# Altium PCB PCB1.PcbDoc
Units mil, origin at the board's own origin, x right, y up, seen from the top; angles counter-clockwise.
Board outline 4832.68 x 2214.57 mil, 2 copper layers (Top Layer, Bottom Layer); 45 components, 47 nets, 237 pads, 146 vias.
Unrouted connection lines stored in the file: 2.
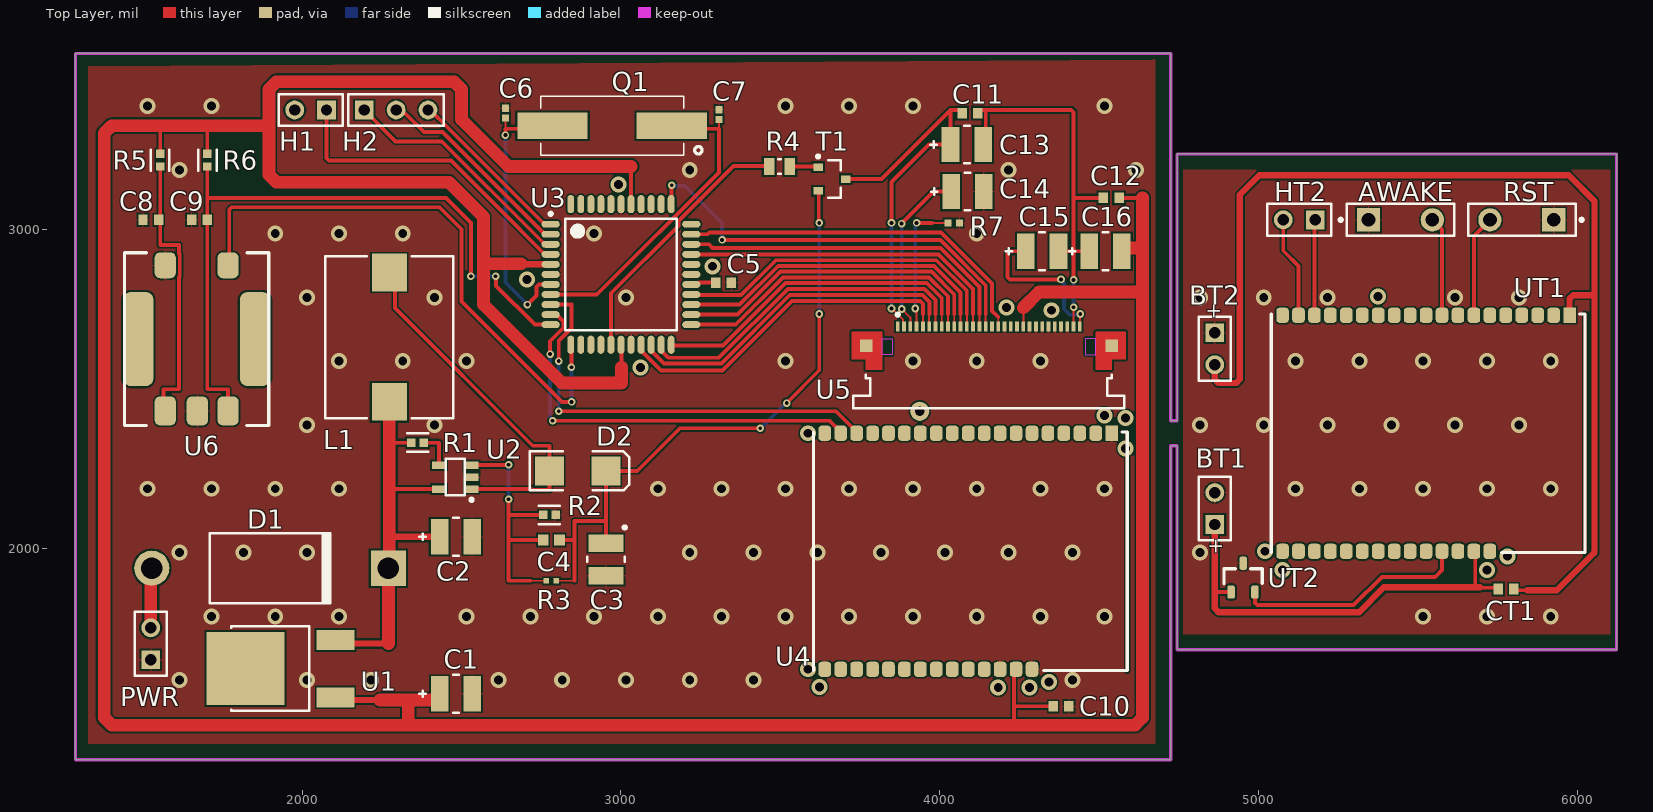
[diagram p0: Top Layer view]
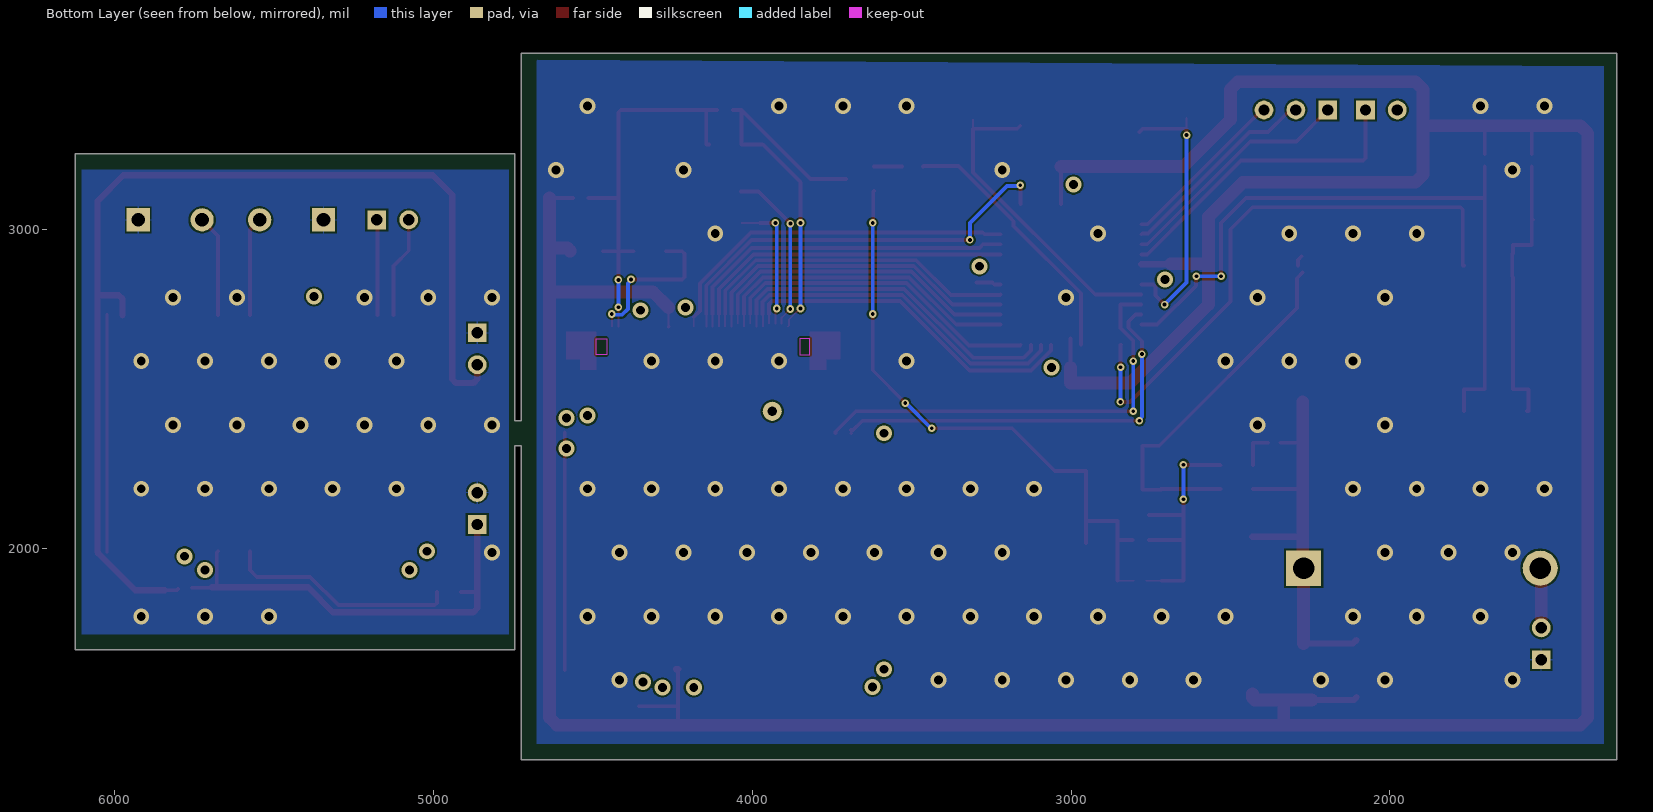
[diagram p1: Bottom Layer view, seen from below]

## Layer stack, top to bottom
Top Solder: solder mask 0.4, Solder Resist, Dk 3.5
Top Layer: signal copper 1.4
Dielectric 1: dielectric 12.6, FR-4, Dk 4.8
Bottom Layer: signal copper 1.4
Bottom Solder: solder mask 0.4, Solder Resist, Dk 3.5

## Board outline
1289.37,1338.58 1289.37,3553.15 4724.41,3553.15 4724.41,2401.57 4744.09,2401.57 4744.09,3238.19 5127.95,3238.19 5679.13,3238.19 6122.05,3238.19 6122.05,1683.07 4744.09,1683.07 4744.09,2322.83 4724.41,2322.83 4724.41,1338.58

## Design rules (kind name [scope] priority, off if disabled: settings)
BoardOutlineClearance [All] p1: gap=7.87 ignorepadtopadclearanceinfootprint=FALSE
Clearance [All] p1: gap=6 ignorepadtopadclearanceinfootprint=TRUE except(9.84: Arc-Hole Track-Hole SMDPad-Hole THPad-Hole Via-Hole Fill-Hole Poly-Hole Region-Hole Text-Hole)
ComponentClearance [All] p1: gap=5 collisioncheckmode=3 verticalgap=5 showdistances=TRUE
DiffPairsRouting [All] p1: maxlimit=10 minlimit=5 mostfreqgap=5 toplayer_minwidth=5 toplayer_maxwidth=1000 toplayer_prefwidth=5 bottomlayer_minwidth=5 bottomlayer_maxwidth=1000 bottomlayer_prefwidth=5 maxuncoupledlength=500
Height [All] p1: minheight=0 maxheight=71497.94 prefheight=500
HoleSize [All] p1: absolutevalues=TRUE maxlimit=248.03 minlimit=11.81 maxpercent=80.000 minpercent=20.000
HoleToHoleClearance [All] p1: gap=9.84 allowstackedmicrovias=FALSE
MinimumAnnularRing [All] p1: minimumring=3
MinimumSolderMaskSliver [All] p1: minsoldermaskwidth=0
PlaneClearance [All] p1: clearance=5
PlaneConnect PlaneConnectPowerPads [InPadClass('PowerPads')] p1: planeconnectstyle=Direct reliefexpansion=20 reliefentries=4 reliefconductorwidth=10 reliefairgap=10
PlaneConnect [All] p2: pad.planeconnectstyle=Relief pad.reliefexpansion=11.81 pad.reliefentries=4 pad.reliefconductorwidth=5 pad.reliefairgap=5 via.planeconnectstyle=Direct via.reliefexpansion=11.81 via.reliefentries=4 via.reliefconductorwidth=5 via.reliefairgap=5
PolygonConnect PolygonConnectPowerPads [All vs (InPadClass('PowerPads'))] p1: connectstyle=Direct reliefconductorwidth=10 reliefentries=4 polygonreliefangle="90 Angle" airgapwidth=10
PolygonConnect [All] p2: thpad.connectstyle=Relief thpad.reliefconductorwidth=5 thpad.reliefentries=4 thpad.polygonreliefangle="90 Angle" thpad.airgapwidth=5 smdpad.connectstyle=Relief smdpad.reliefconductorwidth=5 smdpad.reliefentries=4 smdpad.polygonreliefangle="90 Angle" smdpad.airgapwidth=5 via.connectstyle=Direct via.reliefconductorwidth=5 via.reliefentries=4 via.polygonreliefangle="90 Angle" via.airgapwidth=5
RoutingCorners [All] p1: cornerstyle=90-Degree minsetback=100 maxsetback=100
RoutingVias [All] p1: holewidth=11.81 width=23.62 viastyle="Through Hole" minholewidth=11.81 minwidth=23.62 maxholewidth=23.62 maxwidth=259.84
SilkToSilkClearance [All] p1: silktosilkclearance=0
SilkToSolderMaskClearance [IsPad] p1: minsilkscreentomaskgap=5 clearancetoexposedcopper=TRUE
SolderMaskExpansion [All] p1: expansion=2.95 istentingtop=FALSE
Width "Schematic Width Constraint" [InNet('NetC11_2')] p1: maxlimit=50 minlimit=6 preferedwidth=12 minimp=50.000000 maximp=50.000000 favimp=50.000000
Width [All] p2: maxlimit=50 minlimit=6 preferedwidth=12 minimp=50.000000 maximp=50.000000 favimp=50.000000
19 further rules are at their usual default settings.

## Classes and differential pairs
component class SCH_Wojcik: AWAKE BT1 BT2 C2 C3 C4 C5 C6 C7 C8 C9 C10 C11 C12 C13 C14 C15 C16 CT1 D1 D2 H1 H2 HT2 L1 PWR Q1 R1 R2 R3 R4 R5 R6 R7 RST T1 U1 U2 U7 UT1 UT2

## Components (designator, comment, footprint, x,y, rotation, side; value= is the part's Value field where it differs from the comment)
AWAKE "" SPST-2 5444.49,3031.5 r0 top
BT1 "Battery" BAT-2 4862.2,2125.98 r90 top
BT2 "Battery" BAT-2 4862.2,2627.17 r270 top
C1 "4.7uF" FP-TAJB-MFG 2482.28,1545.28 r180 top
C2 "1uF" FP-TAJB-MFG 2482.28,2037.4 r180 top
C3 "10uF" CAPMP3529X21-T_V 2952.76,1966.54 r270 top
C4 "150pF" CAPC1608X90X35LL15T15 2781.5,2027.56 r0 top
C5 "100nF" CAPC1608X90X35LL10T15 3321.85,2834.65 r180 top
C6 "22pF" CAPC1005X56X25LL10T15 2637.8,3366.14 r270 top
C7 "22pF" CAPC1005X56X25LL10T15 3307.09,3361.81 r270 top
C8 "100nF" CAPC1608X90X35LL10T15 1525.59,3031.5 r0 top
C9 "100nF" CAPC1608X90X35LL10T15 1678.15,3031.5 r0 top
C10 "100nF" CAPC1608X90X35LL10T15 4379.92,1505.91 r180 top
C11 "100nF" CAPC1608X90X35LL10T15 4094.49,3366.14 r180 top
C12 "100nF" CAPC1608X90X35LL10T15 4537.4,3100.39 r180 top
C13 "4.7uF" FP-TAJB-MFG 4084.65,3267.72 r180 top
C14 "4.7uF" FP-TAJB-MFG 4086.61,3120.08 r180 top
C15 "4.7uF" FP-TAJB-MFG 4320.87,2933.07 r180 top
C16 "4.7uF" FP-TAJB-MFG 4519.69,2933.07 r180 top
CT1 "100nF" CAPC1608X90X35LL10T15 5775.59,1874.02 r180 top
D1 "Diode 1N5407" DO-201AD 1899.61,1938.98 r0 top
D2 "D Schottky" SMB 2864.17,2244.09 r0 top
H1 "Header 2" HDR1X2 2076.77,3375.98 r180 top
H2 "Header 3" HDR1X3 2194.88,3375.98 r0 top
HT2 "Header 2" HDR1X2 5177.17,3031.5 r180 top
L1 "33uH" WE-PD4-L 2273.62,2663.39 r90 top
PWR "Header 2" HDR1X2 1525.59,1651.97 r90 top
Q1 "11.059MHZ" XTAL_ABLS2-11.059MHZ-B4Y-T 2972.44,3326.77 r180 top
R1 "10k" FP-CRCW0402-e3-IPC_A 2362.12,2332.68 r180 top
R2 "10k" FP-CRCW0402-e3-IPC_A 2775.51,2106.3 r180 top
R3 "110k" RESC1005X40X25LL05T05 2781.5,1899.61 r0 top
R4 "1k" RESC2013X50X30LL20T20 3497.05,3198.82 r180 top
R5 "10k" FP-CRCW0402-e3-IPC_A 1555.12,3218.5 r90 top
R6 "10k" FP-CRCW0402-e3-IPC_A 1702.76,3218.59 r90 top
R7 "820k" RESC1005X40X25NL05T05 4043.31,3021.65 r180 top
RST "" SPST-2 5825.2,3031.5 r180 top
T1 "BC858C" INF-SOT23_L 3661.42,3159.45 r0 top
U1 "LP2950CDT-3.0" ON_Semi_369C_0 1899.61,1624.02 r270 top
U2 "LM2735X" SOT95P280X145-5N 2480.32,2224.41 r180 top
U3 "Atmega16" 44A_L 3000,2860.24 r0 top
U4 "ETRX357" ETRX357 4095.67,1992.13 r180 top
U5 "OLED 128X64" MOLX-52435-3071 4153.54,2666.85 r0 top
U6 "E20" Encoder 1669.29,2657.48 r0 top
UT1 "ETRX357" ETRX357 5531.5,2362.2 r180 top
UT2 "TC1047" SOT-23 4950.79,1909.45 r0 top

## Footprints (in the part's own frame and the unit in brackets; to place one, negate y for a bottom-side part, rotate by r counter-clockwise, add the part's x,y. Pads: shape width x height; smd on the part's side, far side on the other; paste and mask are expansions set on the pad)
44A_L [mm] "Thin QFP, 44-Leads, Body 10x10mm, Pitch 0.8mm, IPC High Density"
  oval 1.45x0.55 smd: 1(-5.6,4) 2(-5.6,3.2) 3(-5.6,2.4) 4(-5.6,1.6) 5(-5.6,0.8) 6(-5.6,0) 7(-5.6,-0.8) 8(-5.6,-1.6) 9(-5.6,-2.4) 10(-5.6,-3.2) 11(-5.6,-4) 23(5.6,-4) 24(5.6,-3.2) 25(5.6,-2.4) 26(5.6,-1.6) 27(5.6,-0.8) 28(5.6,0) 29(5.6,0.8) 30(5.6,1.6) 31(5.6,2.4) 32(5.6,3.2) 33(5.6,4)
  oval 0.55x1.45 smd: 12(-4,-5.6) 13(-3.2,-5.6) 14(-2.4,-5.6) 15(-1.6,-5.6) 16(-0.8,-5.6) 17(0,-5.6) 18(0.8,-5.6) 19(1.6,-5.6) 20(2.4,-5.6) 21(3.2,-5.6) 22(4,-5.6) 34(4,5.6) 35(3.2,5.6) 36(2.4,5.6) 37(1.6,5.6) 38(0.8,5.6) 39(0,5.6) 40(-0.8,5.6) 41(-1.6,5.6) 42(-2.4,5.6) 43(-3.2,5.6) 44(-4,5.6)
  silkscreen extent -5.72,-4.45 4.45,4.95, body extent -5,-5 5,5, height 1.2
BAT-2 [mm] "Battery; 2 Leads"
  rect 1.5x1.5 hole 0.9: 1(-1.27,0)
  round 1.5 hole 0.9: 2(1.27,0)
  silkscreen extent -2.54,-1.27 2.54,1.27
CAPC1005X56X25LL10T15 [mm] "Chip Capacitor, 2-Leads, Body 1.00x0.50mm, IPC High Density"
  rect 0.58x0.54 smd: 1(-0.39,0) 2(0.39,0)
  body extent -0.55,-0.3 0.55,0.3, height 0.56
CAPC1608X90X35LL10T15 [mm]
  rect 0.75x0.85 smd: 1(-0.625,0) 2(0.625,0)
  body extent -0.85,-0.45 0.85,0.45, height 0.9
CAPC1608X90X35LL15T15 [mm] "Chip Capacitor, 2-Leads, Body 1.60x0.81mm, IPC High Density"
  rect 0.85x0.9 smd: 1(-0.65,0) 2(0.65,0)
  body extent -0.88,-0.48 0.87,0.48, height 0.9
CAPMP3529X21-T_V [mm] "Molded Capacitor, 2-Leads, Body 3.70x3mm"
  rect 1.4x2.8 smd: 1(-1.3,0) 2(1.3,0)
  silkscreen extent -2.67,-1.5 0.2,1.63, body extent -2.07,-1.5 2.07,1.5, height 2.1
DO-201AD [mm] "Diode, Axial; Body 9.5 x 5.6 mm (LxDia. max), Lead Dia. 1.32 mm (max)"
  round 2.8 hole 1.7: 1(-9.42,0)
  rect 2.8x2.8 hole 1.7: 2(9.42,0)
  silkscreen extent -4.8,-2.8 4.9,2.8
Encoder [mm]
  rrect50% 1.7x2.3 smd: A(-2.5,-5.725) B(2.5,-5.725) C(0.053,-5.725)
  rrect50% 1.7x2.05 smd: S1(-2.5,5.87) S2(2.5,5.87)
  rrect50% 2.4x7.5 smd: ""(-4.65,0) ""(4.65,0)
  silkscreen extent -5.75,-6.88 5.75,6.88, body extent -5.75,-6.88 5.75,6.88, height 6.5
ETRX357 [mm]
  rect 1x1.2 smd paste-0.12 mask+0.102: 1(-11.26,-9.4)
  rrect50% 1x1.2 smd paste-0.12 mask+0.102: 2(-9.99,-9.4) 3(-8.72,-9.4) 4(-7.45,-9.4) 5(-6.18,-9.4) 6(-4.91,-9.4) 7(-3.64,-9.4) 8(-2.37,-9.4) 9(-1.1,-9.4) 10(0.17,-9.4) 11(1.44,-9.4) 12(2.71,-9.4) 13(3.98,-9.4) 14(5.25,-9.4) 15(6.52,-9.4) 16(7.79,-9.4) 17(9.06,-9.4) 18(10.33,-9.4) 19(11.6,-9.4) 20(11.6,9.4) 21(10.33,9.4) 22(9.06,9.4) 23(7.79,9.4) 24(6.52,9.4) 25(5.25,9.4) 26(3.98,9.4) 27(2.71,9.4) 28(1.44,9.4) 29(0.17,9.4) 30(-1.1,9.4) 31(-2.37,9.4) 32(-3.64,9.4) 33(-4.91,9.4)
  Top Layer lines w0.254: -12.5,9.5 -12.5,-9.5
  silkscreen extent -12.5,-9.5 12.5,9.5, body extent -12.5,-9.5 12.5,9.5, height 3.8
FP-CRCW0402-e3-IPC_A [mil]
  rect 26.31x26.48 smd paste+0 mask+0: 1(-19.77,0) 2(19.77,0)
  silkscreen extent -33,-29 33,29
FP-TAJB-MFG [mm]
  rect 1.4x2.8 smd paste+0 mask+0: 1(-1.3,0) 2(1.3,0)
  silkscreen extent -0.23,-1.5 2.9,1.5, body extent -2.1,-1.6 2.1,1.6, height 0.25
HDR1X2 [mm] "Connector; Header; 2 Position"
  rect 1.5x1.5 hole 0.9: 1(0,0)
  round 1.5 hole 0.9: 2(2.54,0)
  silkscreen extent -1.27,-1.27 3.81,1.27
HDR1X3 [mm] "Connector; Header; 3 Position"
  rect 1.5x1.5 hole 0.9: 1(0,0)
  round 1.5 hole 0.9: 2(2.54,0) 3(5.08,0)
  silkscreen extent -1.27,-1.27 6.35,1.27
INF-SOT23_L [mm] "SOT23, 3-Leads, Body 2.9x1.3 mm, Pitch 0.95 mm, IPC High Density"
  rect 0.75x0.6 smd: 1(-1.1,0.95) 2(-1.1,-0.95) 3(1.1,0)
  silkscreen extent -1.22,-1.5 0.7,1.92, body extent -0.7,-1.5 0.7,1.5, height 1.1
MOLX-52435-3071 [mm] "FPC Connector, 30-Leads, Right Angle, Pitch 0.5 mm, Mated Height 2.0 mm, SMT"
  rect 0.3x0.8 smd: 1(-7.25,0.762) 2(-6.75,0.762) 3(-6.25,0.762) 4(-5.75,0.762) 5(-5.25,0.762) 6(-4.75,0.762) 7(-4.25,0.762) 8(-3.75,0.762) 9(-3.25,0.762) 10(-2.75,0.762) 11(-2.25,0.762) 12(-1.75,0.762) 13(-1.25,0.762) 14(-0.75,0.762) 15(-0.25,0.762) 16(0.25,0.762) 17(0.75,0.762) 18(1.25,0.762) 19(1.75,0.762) 20(2.25,0.762) 21(2.75,0.762) 22(3.25,0.762) 23(3.75,0.762) 24(4.25,0.762) 25(4.75,0.762) 26(5.25,0.762) 27(5.75,0.762) 28(6.25,0.762) 29(6.75,0.762) 30(7.25,0.762)
  rect 1x1 smd: MP1(-9.779,-0.752) MP2(9.779,-0.752)
  Top Layer region: -8.5,0.362 -10.9,0.362 -10.9,-1.838 -9.8,-1.838 -9.8,-2.688 -8.5,-2.688
  Top Layer region: 8.5,0.362 10.9,0.362 10.9,-1.838 9.8,-1.838 9.8,-2.688 8.5,-2.688
  Keep-Out Layer region: 8.5,-0.193 7.7,-0.193 7.7,-1.493 8.5,-1.493
  Keep-Out Layer region: -8.5,-0.193 -7.7,-0.193 -7.7,-1.493 -8.5,-1.493
  silkscreen extent -10.8,-5.74 10.8,1.84, body extent -10.8,-5.74 10.8,0.86, height 2.05
ON_Semi_369C_0 [mm]
  rect 1.6x3 smd paste+0 mask+0: 1(-2.285,5.215) 3(2.285,5.215)
  rect 5.8x6.2 smd paste+0 mask+0: 4(0,-1.965)
  silkscreen extent -3.36,-3.11 3.36,3.11, body extent -3.27,-5.76 3.27,4.18, height 2.42
RESC1005X40X25LL05T05 [mm] "Chip Resistor, 2-Leads, Body 1.00x0.50mm, IPC High Density"
  rect 0.45x0.45 smd: 1(-0.4,0) 2(0.4,0)
  body extent -0.53,-0.27 0.53,0.28, height 0.4
RESC1005X40X25NL05T05 [mm] "Chip Resistor, 2-Leads, Body 1.00x0.50mm, IPC Medium Density"
  rect 0.55x0.55 smd: 1(-0.45,0) 2(0.45,0)
  body extent -0.53,-0.27 0.53,0.28, height 0.4
RESC2013X50X30LL20T20 [mm] "Chip Resistor, 2-Leads, Body 2.00x1.25mm, IPC High Density"
  rect 0.85x1.35 smd: 1(-0.825,0) 2(0.825,0)
  silkscreen extent -0.1,-0.58 0.1,0.58, body extent -1.1,-0.72 1.1,0.72, height 0.5
SMB [mm] "DO-214-AA/SMB; 2 C-Bend Leads; Body 5.3 x 3.6 mm, inc. leads (LxW)"
  rect 2.3x2.3 smd: 1(-2.25,0) 2(2.25,0)
  silkscreen extent -3.8,-1.55 4.1,1.55
SOT95P280X145-5N [mm] "SOT23, 5-Leads, Body 2,90x2,80mm, Pitch 0,95mm, IPC Medium Density"
  rect 1.1x0.6 smd: 1(-1.3,0.95) 2(-1.3,0) 3(-1.3,-0.95) 4(1.3,-0.95) 5(1.3,0.95)
  silkscreen extent -1.43,-1.45 0.75,1.92, body extent -0.87,-1.52 0.87,1.53, height 1.45
SOT-23 [mm]
  rrect50% 0.6x1.05 smd paste-0.1: 1(-0.95,-1.15) 2(0.95,-1.15) 3(0,1.15)
  silkscreen extent -1.53,-0.5 1.53,0.7, body extent -1.52,-0.7 1.53,0.7, height 1.02
SPST-2 [mm] "Switch; 2 Leads"
  rect 1.85x1.85 hole 1.1: 1(-2.54,0)
  round 1.85 hole 1.1: 2(2.54,0)
  silkscreen extent -4.89,-1.27 4.28,1.27
WE-PD4-L [mm] "SMD Inductor, 2-Leads, Body 12.7 x 10.0 mm"
  rect 3x2.8 smd: 1(-5.15,0) 2(5.15,0)
  silkscreen extent -6.45,-5.1 6.45,5.1, body extent -6.35,-4.95 6.35,4.97, height 4.99
XTAL_ABLS2-11.059MHZ-B4Y-T [mm]
  rect 5.6x2.1 smd: 1(-4.75,0) 2(4.75,0)
  silkscreen extent -7.15,-2.35 5.7,2.35

## Part data
AWAKE RST: library part SW-SPST, "Single-Pole, Single-Throw Switch", LatestRevisionDate=17-Jul-2002, LatestRevisionNote="Re-released for DXP Platform.", PackageDescription="Switch; 2 Leads", PackageReference=SPST-2, Published=24-Mar-1999, Publisher="Altium Limited"
BT1 BT2: "Multicell Battery", LatestRevisionDate=17-Jul-2002, LatestRevisionNote="Re-released for DXP Platform.", PackageDescription="Battery; 2 Leads", PackageReference=BAT-2, Published=24-Mar-1999, Publisher="Altium Limited"
C1 C13 C14 C15 C16: library part cap4.7u, "CAP TANT 4.7UF 10% 10V 1411", Manufacturer="AVX Corporation", Manufacturer Part Number=TAJB475K010RNJ, Package=TAJB, Ripple Current=146mA, Temperature="-55°C to +125°C", Temperature Range High=+125°C, Temperature Range Low=-55°C, Tolerance=10%, Voltage Rating=10V, Automotive=No, Capacitance=4.7uF, Category=Cap, ComponentLink2Description=Datasheet, ComponentLink2URL=http://datasheets.avx.com/TAJ.pdf, Device Class L1="Passive Components", Device Class L2=Capacitors, Device Class L3="Tantalum Capacitors", Digikey Description="CAP TANT 4.7UF 10% 10V 1411", Dissipation Factor=6%, Esr=4Ω, Footprint Url=https://www.avx.com/docs/techinfo/TechSumAppGuide.pdf, Height=2.1mm, Lead Free=Yes, Life=1000Hours, Material=Tantalum, Mouser Description="Cap Tant Solid 4.7uF 10V B CASE 10% (3.5 X 2.8 X 1.9mm) SMD 3528-21 4 Ohm 125 C T/R", Octopart=https://octopart.com/tajb475k010rnj-avx-2636133, RoHS=TRUE
C2: "CAP TANT 1UF 10% 35V 1411", Case Code (Imperial)=1210, Case Code (Metric)=3528, Dielectric Material=Tantalum, ESR (Equivalent Series Resistance)=6.5R, Leakage Current=500nA, Max Operating Temperature=125°C, Min Operating Temperature=-55°C, Package Quantity=1, Tolerance=10%, Voltage=35V, Capacitance=1uF, Case/Package=1210, Construction=Flat, Depth=2.8mm, Dissipation Factor=4%, Features="General Purpose", Height=1.9mm, Height - Seated (Max)=0.083inch, Lead Free="Lead Free", Lead Pitch=1.4mm, Length=3.5mm, Mount="Surface Mount", Number of Pins=2, Packaging="Tape and Reel", Polarity=Polar, Q Factor=4, Radiation Hardening=No, REACH SVHC="No SVHC", RoHS Compliant=Yes, Series=TAJ, Termination=SMD/SMT, Voltage Rating=35V, Voltage Rating (DC)=35V, Width=2.8mm
C3: "Standard Tantalum, 10 uF, +/- 20%, 20 V, -55 to 125 degC, 2-Pin SMD, RoHS, Tape and Reel", Capacitance=10000000pF, Case Code=B, Case Style=Molded, Manufacturer=AVX, Operating Temp Range=-55Cto125C, Package / Case=3528-21, Package Description="2-Pin Surface Mount Device, Body 3.5 x 2.85 mm", Package Reference=CAPMP3529X21-T, Tolerance (+ or -)=20%, Voltage=20VDC, Construction=SMTChip, Datasheet URL=http://datasheets.avx.com/TAJ.pdf, Datasheet Version=02/2016, DCL=2uA, DF=6%, Esr=2.1ohm, Failure Rate=NotRequired, Insulation=NotRequired, Lead Spacing (nom)=NotRequiredmm, Length W/Weld=NotRequiredmm, Length W/Weld (max)=NotRequiredmm, Manufacturer URL=http://www.avx.com/, Mounting Style=SurfaceMount, Mounting Technology=SurfaceMount, Package URL=http://www.avx.com/download/software/literature/AVX-Footprint-Library.pdf, Packaging=TapeandReel, Polarity=Polar, Product Depth (mm)=2.8mm, Product Diameter (mm)=NotRequiredmm, Product Height (mm)=1.9mm, Product Length (mm)=3.5mm, Rad Hardened=No, Seal=NotRequired, Seated Plane Height=NotRequiredmm, Wire Form=NotRequired
C4: Manufacturer=Kemet, Part Number=C0603C151J5GAC7867
C5 C8 C9 C10 C11 C12 CT1: library part cap100n, "Chip Capacitor, 0.1 uF, +/- 10%, 50 V, -55 to 125 degC, 0603 (1608 Metric), RoHS, Tape and Reel", Case Code (Imperial)=0603, Case Code (Metric)=1608, Dielectric=X7R, Dielectric Material=Ceramic, Insulation Resistance=10GR, Manufacturer=Murata, Max Operating Temperature=125degC, Min Operating Temperature=-55degC, Package Description="2-Pin Surface Mount Device, Body 1.6 x 0.8 mm", Package Quantity=1, Tolerance=10%, Voltage=50V, Capacitance=100nF, Case/Package=0603, Contact Plating=Tin, Datasheet URL=http://psearch.en.murata.com/capacitor/product/GRM188R71H104KA93%23.pdf, Datasheet Version=42675.0, Depth=0.8mm, Height=0.8mm, Lead Free=LeadFree, Length=1.6mm, Manufacturer URL=http://www.murata.com/, Material=Ceramic, Mount=SurfaceMount, Number of Pins=2, Package Reference=0603, Packaging=TapeandReel, Radiation Hardening=No, REACH SVHC=NoSVHC, RoHSCompliant=true, Termination=SMD/SMT, Thickness=0.035inch, Voltage Rating=50V, Voltage Rating (DC)=50V, Width=0.8mm
C6 C7: Manufacturer="AVX Interconnect / Elco", Part Number=04025A220JAT2A
D1: "3 Amp Medium Power Silicon Rectifier Diode", ComponentLink1Description="Manufacturer Link", ComponentLink1URL=http://www.irf.com/, DatasheetVersion=Aug-1984, LatestRevisionDate=17-Jul-2002, LatestRevisionNote="Re-released for DXP Platform.", PackageDescription="Diode, Axial; Body 9.5 x 5.3 mm (LxDia. max), Lead Dia. 1.32 mm (max)", PackageReference=DO-201AD, Published=8-Jun-2000, Publisher="Altium Limited"
D2: "Schottky Diode", Code_JEDEC=DO-214-AA, LatestRevisionDate=17-Jul-2002, LatestRevisionNote="Re-released for DXP Platform.", PackageDescription="DO-214-AA/SMB; 2 C-Bend Leads; Body 5.3 x 3.6 mm, inc. leads (LxW)", PackageReference=SMB, Published=8-Jun-2000, Publisher="Altium Limited"
H1 HT2 PWR: "Header, 2-Pin", LatestRevisionDate=17-Jul-2002, LatestRevisionNote="Re-released for DXP Platform.", Publisher="Altium Limited"
H2: "Header, 3-Pin", LatestRevisionDate=17-Jul-2002, LatestRevisionNote="Re-released for DXP Platform.", Publisher="Altium Limited"
L1: library part CMP-0227-00804-1, "SMD-Power Inductor WE-PD4, L = 33.0 µH", Inductance="33.0 ÂµH", ComponentLink1Description="Manufacturer Link", ComponentLink1URL=http://www.we-online.com, ComponentLink2Description=Datasheet, ComponentLink2URL=http://www.we-online.de/katalog/media/pdf/74456133.pdf, DatasheetVersion="ver 2, Sep-2006", PackageDescription="SMD Inductor, 2-Leads, Body 12.7 x 10.0 mm", PackageReference=WE-PD4-L, PackageVersion=2006
Q1: library part ABLS2-11.059MHZ-B4Y-T, "11.059MHz Â±30ppm Crystal 18pF 50 Ohms HC-49/US", Package="HC49/US Abracon", Digi-Key_Part_Number=ABLS2-11.059MHZ-B4Y-T-ND, Digi-Key_Purchase_URL=https://www.digikey.com/product-detail/en/abracon-llc/ABLS2-11.059MHZ-B4Y-T/ABLS2-11.059MHZ-B4Y-T-ND/4866046?utm_source=snapeda&utm_medium=aggregator&utm_campaign=symbol, MF=Abracon, MP=ABLS2-11.059MHZ-B4Y-T, SnapEDA_Link=https://www.snapeda.com/parts/ABLS2-11.059MHZ-B4Y-T/Abracon%20LLC/view-part/481443/?ref=snap
R1 R2 R5 R6: "RES SMD 10K OHM 1% 1/16W 0402", Case Code (Imperial)=0402, Case Code (Metric)=1005, Max Operating Temperature=155°C, Max Power Dissipation=63mW, Min Operating Temperature=-55°C, Package Quantity=10, Resistance=10kR, Temperature Coefficient=100ppm/°C, Tolerance=1%, Voltage Rating=50V, Case/Package=0402, Composition="Thick Film", Contact Plating=Tin, Depth=0.5mm, Features="Automotive AEC-Q200", Height=0.35mm, Lead Free="Lead Free", Length=1mm, Military Standard=Not, Mount="Surface Mount", Number of Pins=2, Number of Terminations=2, Packaging="Tape and Reel", Power Rating=63mW, Radiation Hardening=No, Termination=SMD/SMT, Voltage Rating (DC)=50V, Weight=2.3E-05oz, Width=0.02inch
R3: Manufacturer="Vishay Dale", Part Number=CRCW0402110KFKED
R4: Manufacturer="Vishay Dale", Part Number=CRCW08051K00FKEA
R7: Manufacturer="Vishay Dale", Part Number=CRCW0402820KFKED
T1: library part CMP-1177-00041-1, "PNP Silicon AF Transistor, 30 V VCEO, 100 mA IC, SOT23, Reel, Green", Manufacturer=Infineon, ComponentLink1Description="Manufacturer URL", ComponentLink1URL=http://www.infineon.com/, ComponentLink2Description=Datasheet, ComponentLink2URL=http://www.infineon.com/dgdl/bc857series_bc858series_bc859series_bc860series.pdf?folderId=db3a304314dca389011541d30fa21656&fileId=db3a304314dca389011541da0e3a1661, ComponentLink3Description="Package Specification", ComponentLink3URL=http://www.infineon.com/dgdl/SOT23-Package_Overview.pdf?folderId=db3a30431936bc4b0119532290053c66&fileId=db3a30431936bc4b0119533468123c85, fT (typ)="250Â MHz", Green=TRUE, IBM (max)="200Â mA", IC (max)="100Â mA", ICBO (max)="15Â nA", ICM (max)="200Â mA", Mounting Technology="Surface Mount", PackageDescription="3-Pin Small Outline Transistor Package, 1.3 x 2.9 mm Body, 0.95 mm Pitch", PackageReference=SOT23, PackageVersion=Apr-08, Packing=Reel, PartNumber=BC858C, Polarity=PNP, Ptot (max)="330Â mW", VCBO (max)="30Â V", VCEO (max)="30Â V", VEBO (max)="5Â V"
U5: library part OLED

## Free pads (board coordinates)
  round 60 hole 30: 12(3937.01,2431.1)

## Via types
v1: diameter 50, hole 28, Top Layer to Bottom Layer, 118 vias
v2: diameter 23.62, hole 11.81, Top Layer to Bottom Layer, 28 vias

## Nets (pads, with @x,y where several pads share a name; then routed paths per layer and width w, separated by ;. In a path a pad name is that pad's centre, name@x,y a point inside that pad or via, vN(x,y) a via of type N, cw(c..) or ccw(c..) an arc to the next point about the centre after c; other vN are vias at no path point)
3V: C1.2 C10.2 C12.1 C16.1 R5.2 R6.2 U1.3 U3.5 U3.17 U3.38 U4.32 U5.21 | length 12345.1
  Top Layer w6: U5.21 4261.81,2746.06
  Top Layer w12: R5.2 1555.12,3326.77 ; R6.2 1702.76,3326.77 ; U3.17@3001.85,2659.73 3001.85,2613.37 3001.97,2613.25 3001.97,2568.9 ; U3.38 3031.5,3198.82 ; 4232.28,1446.85 4232.28,1505.91 ; U4.32@4232.28,1622.05 4232.28,1505.91 ; C10.2 4232.28,1505.91 ; C12.1 4635.83,3100.39
  Top Layer w20: U1.3 2113.39,1525.59 2244.09,1525.59 ; 2687.01,2893.7 2688.98,2891.73 U3.5 ; U4.32@4232.28,1622.05 U4.32
  Top Layer w40: 2244.1,1525.59 2332.68,1525.59 ; C1.2 2431.1,1533.15 2423.54,1525.59 2332.68,1525.59 ; 2687.01,2893.7 2568.9,2893.7 ; 3001.97,2568.9 3001.97,2519.68 2814.96,2519.68 2568.9,2765.75 2568.9,2893.7 ; 3031.5,3198.82 2647.64,3198.82 2500,3346.46 2500,3441.14 2476.57,3464.57 1919.47,3464.57 1896.04,3441.14 1896.04,3326.77 ; 4261.81,2755.91 4311.02,2805.12 4635.83,2805.12 ; C16.1 4570.87,2935.35 4578.43,2942.91 4635.83,2942.91 ; 4635.83,3100.39 4635.83,2942.91 ; 1896.04,3326.77 1702.76,3326.77 1555.12,3326.77 1402.86,3326.77 1379.43,3303.34 1379.43,1470.28 1402.86,1446.85 2332.68,1446.85 ; 1896.04,3326.77 1896.04,3173.04 1919.47,3149.61 2460.63,3149.61 2568.9,3041.34 2568.9,2893.7 ; 2332.68,1446.85 4232.28,1446.85 4612.4,1446.85 4635.83,1470.28 4635.83,2805.12 ; 2332.68,1446.85 2332.68,1525.59 ; 4635.83,2805.12 4635.83,2824.8 4635.83,2942.91
BATTERY+: BT1.1 CT1.2 UT1.32 UT2.1 | length 1376.7
  Top Layer w12: 4862.2,1864.17 UT2.1 ; UT1.32 5679.13,1987.8 5679.13,1929.13 5679.13,1877.95 CT1.2@5756.98,1877.95
  Top Layer w20: BT1.1 4862.2,1864.17 4862.2,1812.9 4873.92,1801.18 5314.96,1801.18 5392.59,1878.81 5679.13,1878.81 5693.77,1878.81
BATTERY-: BT2.2 CT1.1 UT1.1 | length 3424.1
  Top Layer w12: CT1.1 5804.13,1870.08 5842.52,1870.08
  Top Layer w20: BT2.2 4862.2,2531.4 4873.92,2519.68 4929.23,2519.68 4940.94,2531.4 4940.94,3110.24 5001.81,3171.1 5972.28,3171.1 6053.15,3090.24 6053.15,2795.28 ; 5842.52,1870.08 5935.04,1870.08 6032.15,1967.19 6032.32,1967.19 6044.62,1979.49 6044.62,1979.66 6053.15,1988.19 6053.15,2795.28 ; UT1.1 5974.8,2783.56 5986.52,2795.28 6053.15,2795.28
GND: AWAKE.1 BT1.2 BT2.1 C1.1 C2.1 C3.2 C5.1 C6.1 C7.1 C8.1 C9.1 C10.1 C14.1 PWR.1 R2.1 R7.1 RST.1 U2.2 U3.6 U3.18 U3.28 U3.39 U4.1 U4.13 U4.19 U4.20 U4.31 U4.33 U5.18 U5.22 U5.23 U5.24 U5.25 U5.26 U5.27 U5.28 U6.C U6.S1 UT1.13 UT1.20 UT1.33 UT2.3
  other v1: 1615.75,1588.19 2015.75,1588.19 2215.75,1588.19 2615.75,1588.19 2815.75,1588.19 3015.75,1588.19 3215.75,1588.19 3415.75,1588.19 4415.75,1588.19 1715.75,1788.19 1915.75,1788.19 2115.75,1788.19 2515.75,1788.19 2715.75,1788.19 2915.75,1788.19 3115.75,1788.19 3315.75,1788.19 3515.75,1788.19 3715.75,1788.19 3915.75,1788.19 4115.75,1788.19 4315.75,1788.19 4515.75,1788.19 5515.75,1788.19 5715.75,1788.19 5915.75,1788.19 1615.75,1988.19 1815.75,1988.19 2015.75,1988.19 3215.75,1988.19 3415.75,1988.19 3615.75,1988.19 3815.75,1988.19 4015.75,1988.19 4215.75,1988.19 4415.75,1988.19 4815.75,1988.19 1515.75,2188.19 1715.75,2188.19 1915.75,2188.19 2115.75,2188.19 3115.75,2188.19 3315.75,2188.19 3515.75,2188.19 3715.75,2188.19 3915.75,2188.19 4115.75,2188.19 4315.75,2188.19 4515.75,2188.19 5115.75,2188.19 5315.75,2188.19 5515.75,2188.19 5715.75,2188.19 5915.75,2188.19 2015.75,2388.19 2415.75,2388.19 4815.75,2388.19 5015.75,2388.19 5215.75,2388.19 5415.75,2388.19 5615.75,2388.19 5815.75,2388.19 2115.75,2588.19 2315.75,2588.19 2515.75,2588.19 3515.75,2588.19 3915.75,2588.19 4115.75,2588.19 4315.75,2588.19 5115.75,2588.19 5315.75,2588.19 5515.75,2588.19 5715.75,2588.19 5915.75,2588.19 2015.75,2788.19 2415.75,2788.19 3015.75,2788.19 4815.75,2788.19 5015.75,2788.19 5215.75,2788.19 5615.75,2788.19 5815.75,2788.19 1915.75,2988.19 2115.75,2988.19 2315.75,2988.19 2915.75,2988.19 4115.75,2988.19 1615.75,3188.19 3215.75,3188.19 4215.75,3188.19 4615.75,3188.19 1515.75,3388.19 1715.75,3388.19 3515.75,3388.19 3715.75,3388.19 3915.75,3388.19 4515.75,3388.19
MISO: H2.2 U3.2 | length 646.1
  Top Layer w12: H2.2 2303.89,3366.98 2322,3366.98 2381.89,3307.09 2440.16,3307.09 2758.26,2988.98 2776.77,2988.98 U3.2
MOSI: H2.3 U3.1 | length 533
  Top Layer w12: H2.3 2401.57,3375.98 2459.06,3318.5 2759.84,3017.72 U3.1
NetAWAKE_2: AWAKE.2 UT1.9 | length 311.8
  Top Layer w12: AWAKE.2 5574.8,3001.18 UT1.9
NetC2_2: C2.2 D1.2 L1.1 R1.2 U1.1 U2.5 | length 1308.1
  Top Layer w12: 2273.62,2187.01 U2.5 ; 2273.62,2332.68 R1.2 R1.2@2343.12,2332.68
  Top Layer w20: U1.1 2116.14,1702.76 2270.99,1702.76 ; 2273.62,2037.4 C2.2
  Top Layer w40: D1.2 2270.99,1938.46 2270.99,1702.76 ; D1.2@2273.62,1942.13 2273.62,2037.4 2273.62,2187.01 2273.62,2332.68 L1.1
NetC3_1: C3.1 C4.2 D2.2 R3.2 T1.2 | length 1974.9
  Top Layer w6: R3.2@2802.86,1899.61 2854.33,1899.61
  Top Layer w12: C4.2 2854.33,2027.56 ; 2854.33,1899.61 2854.33,2027.56 ; C3.1 2952.76,2086.61 ; v2(3437.01,2377.76) 3184.85,2377.76 3051.18,2244.09 D2.2 2952.76,2086.61 ; v2(3519.68,2456.69) 3519.68,2457.63 3622.05,2559.99 3622.05,2586.1 v2(3622.05,2736.22) ; T1.2 3620.08,3120.08 3620.08,3023.62 v2(3622.05,3021.65) ; 2854.33,2027.56 2854.33,2086.61 2952.76,2086.61
  Bottom Layer w12: v2(3437.01,2377.76) 3438.88,2377.76 3517.81,2456.69 v2(3519.68,2456.69) ; v2(3622.05,2736.22) v2(3622.05,3021.65)
NetC4_1: C4.1 R2.2 R3.1 U2.3 | length 815.6
  Top Layer w6: 2716.54,1899.61 R3.1
  Top Layer w12: U2.3 2532.48,2262.8 2646.65,2262.8 v2(2647.64,2263.78) ; v2(2647.64,2155.51) 2647.64,2106.3 ; 2716.54,1899.61 2647.64,1899.61 2647.64,2027.56 ; R2.2 2647.64,2106.3 ; C4.1 2647.64,2027.56 ; 2647.64,2027.56 2647.64,2106.3
  Bottom Layer w12: v2(2647.64,2155.51) v2(2647.64,2263.78)
NetC5_2: C5.2 U3.27 | length 79.2
  Top Layer w12: U3.27 3240.8,2828.74 3246.71,2834.65 C5.2
NetC6_2: C6.2 Q1.2 U3.7 | length 880.2
  Top Layer w6: 2637.8,3316.93 C6.2
  Top Layer w12: v2(2637.8,3297.24) 2637.8,3316.93 2775.59,3316.93 Q1.2@2785.43,3307.09 ; v2(2706.69,2765.75) 2735.3,2794.36 2735.3,2821.71 2742.33,2828.74 U3.7
  Bottom Layer w12: v2(2637.8,3297.24) 2637.8,2834.65 v2(2706.69,2765.75)
NetC7_2: C7.2 Q1.1 U3.8 | length 1004.1
  Top Layer w6: 3307.09,3316.93 C7.2
  Top Layer w12: U3.8 2924.01,2797.24 3307.09,3180.32 3307.09,3316.93 3169.29,3316.93 Q1.1
NetC8_2: C8.2 R5.1 U6.A | length 887.5
  Top Layer w12: C8.2 C8.2@1555.12,3031.5 ; R5.1 C8.2@1555.12,3031.5 ; U6.A 1564.96,2432.09 1564.96,2500 1614.17,2500 1614.17,2850.9 1616.33,2853.06 1616.33,2924.11 1614.17,2926.26 1614.17,2952.76 1555.12,2952.76 C8.2@1555.12,3031.5
NetC9_2: C9.2 R6.1 U3.11 U6.B | length 2187.6
  Top Layer w12: R6.1 1702.76,3100.39 ; U6.B 1767.72,2500 1702.76,2500 C9.2 1702.76,3100.39 ; v2(2529.53,2854.33) 2529.53,3021.65 2450.79,3100.39 1702.76,3100.39 ; v2(2606.71,2854.33) 2608.55,2852.49 2608.55,2824.52 2730.31,2702.76 U3.11
  Bottom Layer w12: v2(2529.53,2854.33) v2(2606.71,2854.33)
NetC11_1: C11.1 C12.2 C13.1 C15.1 C16.2 U5.29 | length 1291.2
  Top Layer w6: U5.29 4419.29,2726.47 v2(4419.29,2757.46)
  Top Layer w12: C11.1@4109.25,3375.98 4143.7,3375.98 ; C13.1 4143.7,3267.72 4143.7,3375.98 ; C15.1 4419.29,2933.07 ; v2(4419.29,2842.93) 4419.29,2933.07 ; C16.2 4419.29,2933.07 ; C12.2 4419.29,3100.39 ; 4143.7,3375.98 4412.26,3375.98 4419.29,3368.95 4419.29,3100.39 ; 4419.29,2933.07 4419.29,3100.39
  Bottom Layer w12: v2(4419.29,2757.46) v2(4419.29,2842.93)
NetC11_2: C11.2 C13.2 T1.3 U5.2 | length 1257.8
  Top Layer w6: v2@3853.26,2749.71 3884.89,2718.08 3884.89,2699.76 U5.2
  Top Layer w12: T1.3 3816.93,3159.45 3925.2,3267.72 4033.46,3375.98 ; v2(3848.43,2753.46) 3850.65,2751.24 v2@3850.65,2747.09 ; v2(3848.43,3021.65) 3848.43,3149.61 3966.54,3267.72 C13.2 4033.46,3375.98 ; C11.2@4060.04,3375.98 4033.46,3375.98
  Bottom Layer w12: v2(3848.43,2753.46) v2(3848.43,3021.65)
NetC14_2: C14.2 U5.3 | length 521.3
  Top Layer w6: v2(3880.52,2751.88) 3907.48,2724.92 U5.3@3907.48,2706.69
  Top Layer w12: v2(3880.07,3019.63) 3980.52,3120.08 C14.2
  Bottom Layer w12: v2(3880.07,3019.63) 3880.3,3019.4 3880.3,2752.11 v2(3880.52,2751.88)
NetC15_2: C15.2 U5.30 | length 500.2
  Top Layer w6: U5.30 4439.54,2697.41 4439.54,2735.66 v2(4440.1,2736.22)
  Top Layer w12: C15.2 4219.63,2933.07 4212.6,2926.04 4212.6,2851.52 4219.63,2844.49 v2(4379.92,2844.49)
  Bottom Layer w12: v2(4379.92,2844.49) 4379.92,2841.49 4389.76,2831.65 4389.76,2751.97 4408.08,2733.65 4429.15,2733.65 4429.5,2734 4437.88,2734 v2(4440.1,2736.22)
NetD1_1: D1.1 PWR.2 | length 187
  Top Layer w40: PWR.2 D1.1@1525.59,1938.98
NetD2_1: D2.1 L1.2 U2.1 | length 1202.1
  Top Layer w12: L1.2 2291.25,2848.51 2291.25,2754.84 2723.26,2322.83 2775.59,2322.83 D2.1 2775.59,2185.04 2716.54,2185.04 2718.5,2187.01 U2.1 ; L1.2@2276.81,2917.32 2288.53,2905.61 L1.2@2288.53,2888.64
NetHT2_2: HT2.2 UT1.18 | length 318.9
  Top Layer w12: HT2.2 5077.17,2934.65 5124.8,2887.01 UT1.18
NetR1_1: R1.1 U2.4 | length 118.1
  Top Layer w12: R1.1 2429.13,2332.68 U2.4
NetR4_1: R4.1 T1.1 | length 88.6
  Top Layer w12: R4.1 T1.1@3618.11,3198.82
NetR4_2: R4.2 U3.16 | length 831.8
  Top Layer w12: U3.16 2968.5,2801.18 3179.93,3012.61 3179.93,3027.17 3193.3,3040.54 3352.89,3200.13 3463.25,3200.13 R4.2
NetR7_2: R7.2 U5.4 | length 424.7
  Top Layer w6: v2(3923.04,2753.46) 3927.17,2749.34 U5.4@3927.17,2706.69 ; 3976.38,3021.65 4005.91,3021.65 R7.2 R7.2@4033.46,3021.65
  Top Layer w12: v2(3927.17,3021.65) 3976.38,3021.65
  Bottom Layer w12: v2(3923.04,2753.46) 3923.04,3014.38 3927.17,3018.51 v2(3927.17,3021.65)
NetRST_2: RST.2 UT1.7 | length 320.1
  Top Layer w12: UT1.7 5674.8,2981.1 RST.2
NetU3_9: U3.9 U4.17 | length 1381
  Top Layer w12: U3.9 2844.49,2765.75 2844.49,2692.26 2805.12,2652.89 v2(2805.12,2588.58) ; v2(2805.12,2431.1) 3674.59,2431.1 3738.98,2366.72 U4.17
  Bottom Layer w12: v2(2805.12,2431.1) v2(2805.12,2588.58)
NetU3_10: U3.10 U4.18 | length 1298.8
  Top Layer w12: v2(2777.72,2610.4) 2777.72,2650.95 2820.07,2693.3 2820.07,2712.21 2798.03,2734.25 U3.10 ; v2(2785.43,2401.57) 3654.12,2401.57 3683.65,2372.05 U4.18@3690.95,2372.05
  Bottom Layer w12: v2(2777.72,2610.4) 2777.72,2414.42 2779.62,2412.51 2779.62,2410.53 2785.43,2404.72 v2(2785.43,2401.57)
NetU3_12: U3.12 U6.S2 | length 1822.8
  Top Layer w12: U6.S2 1771.65,2888.58 1771.65,3063.84 1778.68,3070.87 2431.1,3070.87 2500,3001.97 2500,2775.59 2814.96,2460.63 v2(2845.16,2460.63) ; U3.12 2844.49,2639.76 v2(2844.49,2568.9)
  Bottom Layer w12: v2(2844.49,2568.9) 2844.49,2460.63 v2(2845.16,2460.63)
NetU3_19: U3.19 U5.5 | length 1084
  Top Layer w6: U5.5@3946.85,2706.69 3946.85,2736.22
  Top Layer w12: U3.19 3062.99,2621.26 3125.2,2559.05 3318.63,2559.05 3536.85,2777.28 3938.14,2777.28 3946.85,2768.56 3946.85,2746.06 3946.85,2736.22
NetU3_20: U3.20 U5.6 | length 1082.2
  Top Layer w6: U5.6 3966.54,2736.22
  Top Layer w12: U3.20 3094.49,2621.26 3134.53,2581.22 3315.34,2581.22 3529.39,2795.28 3937.01,2795.28 3945.59,2795.28 3967.07,2773.79 3967.07,2736.22
NetU3_21: U3.21 U5.7 | length 1074.9
  Top Layer w6: U5.7 3986.22,2736.22
  Top Layer w12: U3.21 3125.98,2621.26 3148.03,2599.22 3307.88,2599.22 3523.62,2814.96 3951.36,2814.96 3986.22,2780.1 3986.22,2736.22
NetU3_22: U3.22 U5.8 | length 1028.8
  Top Layer w6: U5.8@4005.91,2706.69 4005.91,2736.22
  Top Layer w12: U3.22 3159.45,2637.8 3320.33,2637.8 3515.49,2832.96 3958.82,2832.96 4005.91,2785.87 4005.91,2746.06 4005.91,2736.22
NetU3_23: U3.23 U5.9 | length 985.9
  Top Layer w6: U5.9 4025.59,2736.22
  Top Layer w12: U3.23 3359.83,2702.76 3508.04,2850.96 3966.27,2850.96 4025.59,2791.64 4025.59,2736.22
NetU3_24: U3.24 U5.10 | length 1001
  Top Layer w6: U5.10@4045.28,2706.69 4045.28,2736.22
  Top Layer w12: U3.24 3365.87,2734.25 3500.58,2868.96 3973.73,2868.96 4045.28,2797.41 4045.28,2746.06 4045.28,2736.22
NetU3_25: U3.25 U5.11 | length 1035.7
  Top Layer w6: U5.11 4064.96,2736.22
  Top Layer w12: U3.25 3371.91,2765.75 3493.13,2886.96 3981.19,2886.96 4064.96,2803.19 4064.96,2736.22
NetU3_26: U3.26 U5.12 | length 1062.3
  Top Layer w6: U5.12 4084.65,2736.22
  Top Layer w12: U3.26 3222.32,2795.4 3246.86,2795.4 3246.98,2795.28 3375.98,2795.28 3485.67,2904.96 3988.64,2904.96 4084.65,2808.96 4084.65,2736.22
NetU3_30: U3.30 U5.13 | length 1046.7
  Top Layer w6: U5.13 4104.33,2736.22
  Top Layer w12: U3.30 3995.83,2923.23 4104.33,2814.73 4104.33,2736.22
NetU3_31: U3.31 U5.14 | length 1082.8
  Top Layer w6: U5.14 4124.02,2736.22
  Top Layer w12: U3.31 3275.59,2954.72 3287.4,2942.91 4001.6,2942.91 4124.02,2820.5 4124.02,2736.22
NetU3_32: U3.32 U5.17 | length 1155
  Top Layer w6: U5.17 4183.07,2726.38
  Top Layer w12: U3.32 3271.65,2986.22 3277.56,2992.13 4003.3,2992.13 4163.39,2832.04 4163.39,2746.06 4183.07,2726.38
NetU3_33: U3.33
NetU3_34: U3.34 U5.15 | length 1334.6
  Top Layer w6: U5.15 4143.7,2736.22
  Top Layer w12: U3.34 3158.46,3081.69 3158.46,3138.78 v2(3159.45,3139.76) ; v2(3316.93,2968.32) 4001.65,2968.32 4143.7,2826.27 4143.7,2736.22
  Bottom Layer w12: v2(3159.45,3139.76) 3161.67,3137.54 3201.04,3137.54 3316.93,3021.65 v2(3316.93,2968.32)
NetUT1_30: UT1.30 UT2.2 | length 728.1
  Top Layer w12: UT2.2 4988.19,1830.21 4995.22,1823.18 5297.59,1823.18 5386.17,1911.76 5553.5,1911.76 5574.8,1933.07 UT1.30
RES: H1.1 U3.4 | length 978.9
  Top Layer w12: H1.1 2076.77,3224.78 2083.8,3217.75 2466.5,3217.75 2608.27,3075.99 2761.03,2923.23 U3.4
RXD: HT2.1 UT1.17 | length 300.2
  Top Layer w10: HT2.1@5174.8,3029.13 HT2.1
  Top Layer w12: UT1.17 HT2.1@5174.8,3029.13
SCK: H2.1 U3.3 | length 759.1
  Top Layer w12: H2.1 2293.31,3277.56 2438.19,3277.56 2738.98,2976.77 2761.03,2954.72 U3.3
pads on no net: H1.2 U1.4 U3.13 U3.14 U3.15 U3.29 U3.35 U3.36 U3.37 U3.40 U3.41 U3.42 U3.43 U3.44 U4.2 U4.3 U4.4 U4.5 U4.6 U4.7 U4.8 U4.9 U4.10 U4.11 U4.12 U4.14 U4.15 U4.16 U4.21 U4.22 U4.23 U4.24 U4.25 U4.26 U4.27 U4.28 U4.29 U4.30 U5.1 U5.16 U5.19 U5.20 U5.MP1 U5.MP2 U6. UT1.2 UT1.3 UT1.4 UT1.5 UT1.6 UT1.8 UT1.10 UT1.11 UT1.12 UT1.14 UT1.15 UT1.16 UT1.19 UT1.21 UT1.22 UT1.23 UT1.24 UT1.25 UT1.26 UT1.27 UT1.28 UT1.29 UT1.31
copper on no net:
  other v1: 4183.07,1564.96 4183.07,1564.96 4281.5,1564.96 3622.05,1566.93 4342.52,1582.68 3586.61,1622.05 5074.8,1933.07 5716.54,1933.07 5779.53,1976.38 5019.69,1992.13 4582.68,2314.96 3586.61,2362.2 4582.68,2409.45 4515.75,2417.32 3061.02,2568.9 4350.39,2748.03 4208.66,2755.91 5374.02,2791.34 2705.71,2844.49 3287.4,2885.83 2992.13,3141.73

## Polygon pours and split planes (outlines as drawn)
GND on Top Layer "GND_L01_P003" (solid, remove dead copper, pour order 3): 4763.78,3188.98 6102.36,3188.98 6102.36,1732.28 4763.78,1732.28
GND on Top Layer "GND_L01_P000" (solid, remove dead copper, pour order 0): 1328.74,3513.78 1328.74,1387.8 4675.2,1387.8 4675.2,3533.46 4665.35,3533.46
GND on Bottom Layer "GND_L02_P005" (solid, remove dead copper, pour order 5): 4763.78,3188.98 4763.78,1732.28 6102.36,1732.28 6102.36,3188.98
GND on Bottom Layer "GND_L02_P004" (solid, remove dead copper, pour order 4): 1328.74,3513.78 1328.74,1387.8 4675.2,1387.8 4675.2,3533.46

## Keep-outs
Top Layer:
  lines w10: 1289.37,1338.58 4724.41,1338.58 4724.41,2322.83 4744.09,2322.83 4744.09,2244.09 4744.09,1683.07 6122.05,1683.07 6122.05,3238.19 5679.13,3238.19 5127.95,3238.19 4744.09,3238.19 4744.09,2401.57 4724.41,2401.57 4724.41,3553.15 1289.37,3553.15 1289.37,1338.58

## Text inside footprints (layer, text, board x,y; h text height)
BT1: Top Overlay "+" at 4884.92,1981.5 h45.28 r90
BT2: Top Overlay "+" at 4839.49,2771.65 h45.28 r270